# Altium PCB Driver LCD.PcbDoc
Units mm, origin at the board's own origin, x right, y up, seen from the top; angles counter-clockwise.
Board outline 152.4 x 101.6 mm, 2 copper layers (Top Layer, Bottom Layer); 4 components, 12 nets, 30 pads, 0 vias.
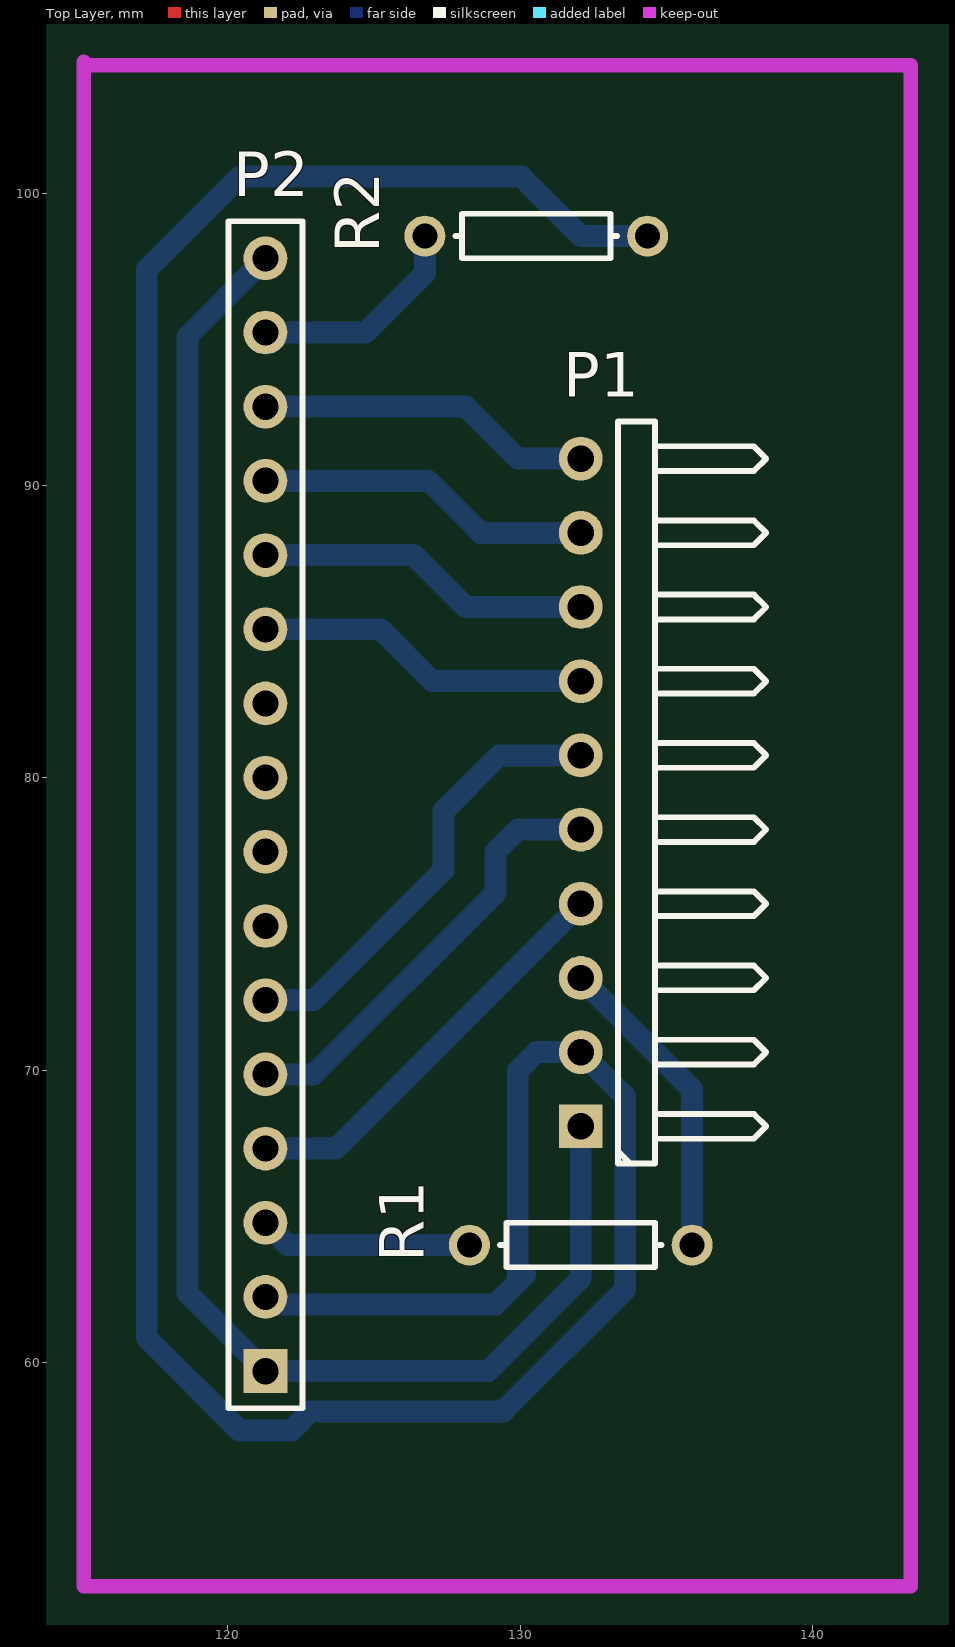
[diagram p0: Top Layer view]
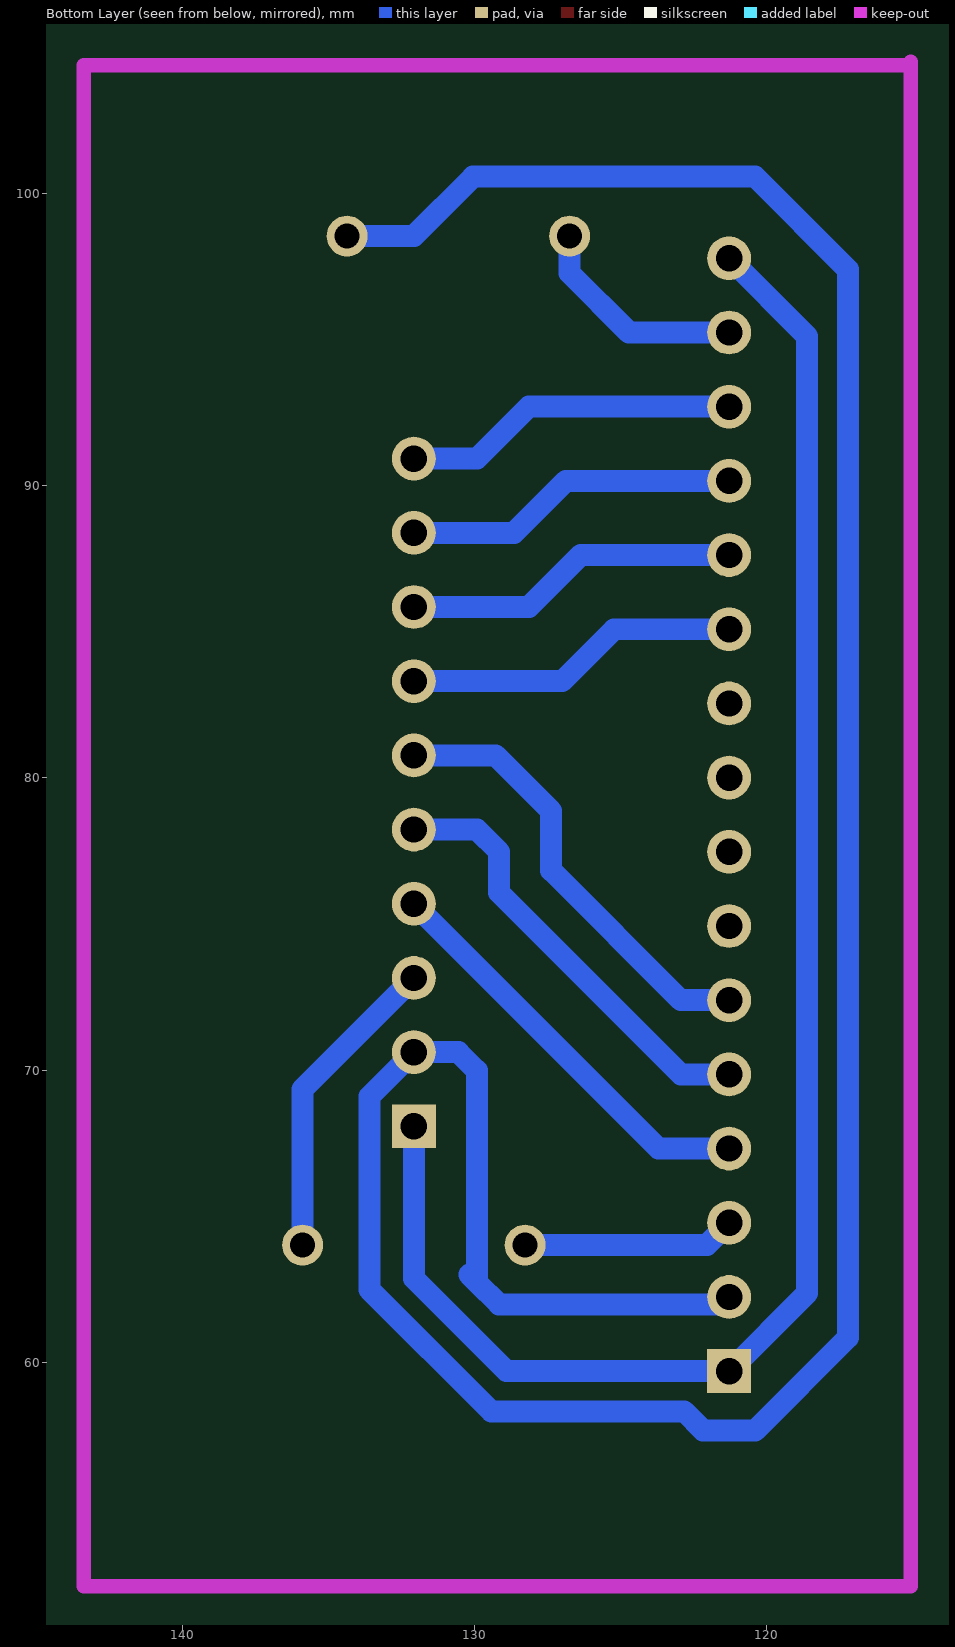
[diagram p1: Bottom Layer view, seen from below]

## Layer stack, top to bottom
Top Layer: signal copper 0.0356
Dielectric: dielectric 0.32, FR-4, Dk 4.8
Bottom Layer: signal copper 0.0356

## Board outline
25.4,25.4 177.8,25.4 177.8,127 25.4,127

## Design rules (kind name [scope] priority, off if disabled: settings)
Clearance [All] p1: gap=0.254
PolygonConnect [All] p1: connectstyle=Relief reliefconductorwidth=0.254 reliefentries=4 polygonreliefangle="90 Angle"
RoutingVias [All] p1: holewidth=0.711 width=1.27 viastyle="Through Hole" minholewidth=0.711 minwidth=1.27 maxholewidth=0.711 maxwidth=1.27
SilkscreenOverComponentPads [All] p1: minsilkscreentomaskgap=0.254
SolderMaskExpansion [All] p1: expansion=0.102
Width [All] p1: maxlimit=0.75 minlimit=0.75 preferedwidth=0.75
27 further rules are at their usual default settings.

## Components (designator, comment, footprint, x,y, rotation, side; value= is the part's Value field where it differs from the comment)
P1 "Header 10H" HDR1X10H 132.08,68.072 r90 top
P2 "Header 16" HDR1X16 121.285,59.69 r90 top
R1 "Res1" AXIAL-0.3 132.08,64.008 r180 top
R2 "Res1" AXIAL-0.3 130.556,98.552 r180 top

## Footprints (in the part's own frame and the unit in brackets; to place one, negate y for a bottom-side part, rotate by r counter-clockwise, add the part's x,y. Pads: shape width x height; smd on the part's side, far side on the other; paste and mask are expansions set on the pad)
AXIAL-0.3 [mm] "Axial Device, Thru-Hole; 2 Leads; 0.3 in Pin Spacing"
  round 1.4 hole 0.85: 1(-3.81,0) 2(3.81,0)
  silkscreen extent -2.77,-0.76 2.77,0.76
HDR1X10H [mm] "Connector; Header; 10 Position; Right Angle"
  rect 1.5x1.5 hole 0.9: 1(0,0)
  round 1.5 hole 0.9: 2(2.54,0) 3(5.08,0) 4(7.62,0) 5(10.16,0) 6(12.7,0) 7(15.24,0) 8(17.78,0) 9(20.32,0) 10(22.86,0)
  silkscreen extent -1.27,-6.35 24.13,-1.27
HDR1X16 [mm] "Connector; Header; 16 Position"
  rect 1.5x1.5 hole 0.9: 1(0,0)
  round 1.5 hole 0.9: 2(2.54,0) 3(5.08,0) 4(7.62,0) 5(10.16,0) 6(12.7,0) 7(15.24,0) 8(17.78,0) 9(20.32,0) 10(22.86,0) 11(25.4,0) 12(27.94,0) 13(30.48,0) 14(33.02,0) 15(35.56,0) 16(38.1,0)
  silkscreen extent -1.27,-1.27 39.37,1.27

## Part data
P1: "Header, 10-Pin, Right Angle"
P2: "Header, 16-Pin"
R1 R2: "Resistor"

## Nets (pads, with @x,y where several pads share a name; then routed paths per layer and width w, separated by ;. In a path a pad name is that pad's centre, name@x,y a point inside that pad or via, vN(x,y) a via of type N, cw(c..) or ccw(c..) an arc to the next point about the centre after c; other vN are vias at no path point)
NetP1_1: P1.1 P2.1 P2.16 | length 57.6
  Bottom Layer w0.75: P2.16 118.618,95.123 118.618,62.357 P2.1 128.905,59.69 132.08,62.865 P1.1
NetP1_2: P1.2 P2.2 R2.1 | length 103.4
  Bottom Layer w0.75: P2.2 121.539,61.976 129.159,61.976 129.921,62.738 ; 130.175,62.992 129.921,62.738 ; R2.1 132.08,98.552 130.048,100.584 120.396,100.584 117.221,97.409 117.221,60.833 120.396,57.658 122.174,57.658 122.827,58.311 129.431,58.311 133.604,62.484 133.604,69.088 P1.2 130.556,70.612 129.921,69.977 129.921,62.738
NetP1_3: P1.3 R1.1 | length 10.7
  Bottom Layer w0.75: P1.3 135.89,69.342 R1.1
NetP1_4: P1.4 P2.4 | length 14.3
  Bottom Layer w0.75: P2.4 123.698,67.31 P1.4
NetP1_5: P1.5 P2.5 | length 15.1
  Bottom Layer w0.75: P2.5 122.936,69.85 129.159,76.073 129.159,77.47 129.921,78.232 P1.5
NetP1_6: P1.6 P2.6 | length 15.5
  Bottom Layer w0.75: P2.6 122.936,72.39 127.381,76.835 127.381,78.867 129.286,80.772 P1.6
NetP1_7: P1.7 P2.11 | length 11.5
  Bottom Layer w0.75: P2.11 125.222,85.09 127,83.312 P1.7
NetP1_8: P1.8 P2.12 | length 11.5
  Bottom Layer w0.75: P2.12 126.365,87.63 128.143,85.852 P1.8
NetP1_9: P1.9 P2.13 | length 11.5
  Bottom Layer w0.75: P2.13 126.873,90.17 128.651,88.392 P1.9
NetP1_10: P1.10 P2.14 | length 11.5
  Bottom Layer w0.75: P2.14 128.143,92.71 129.921,90.932 P1.10
NetP2_3: P2.3 R1.2 | length 7.3
  Bottom Layer w0.75: P2.3 122.047,64.008 R1.2
NetP2_15: P2.15 R2.2 | length 7.6
  Bottom Layer w0.75: P2.15 124.714,95.25 126.746,97.282 R2.2
pads on no net: P2.7 P2.8 P2.9 P2.10

## Keep-outs
Keep-Out Layer:
  lines w0.5: 115.062,104.394 143.383,104.394 143.383,52.324 115.062,52.324 115.062,104.521